# Altium PCB PCB1.PcbDoc
Units mil, origin at the board's own origin, x right, y up, seen from the top; angles counter-clockwise.
Board outline 3755 x 4055 mil, 2 copper layers (Top Layer, Bottom Layer); 83 components, 78 nets, 332 pads, 78 vias.
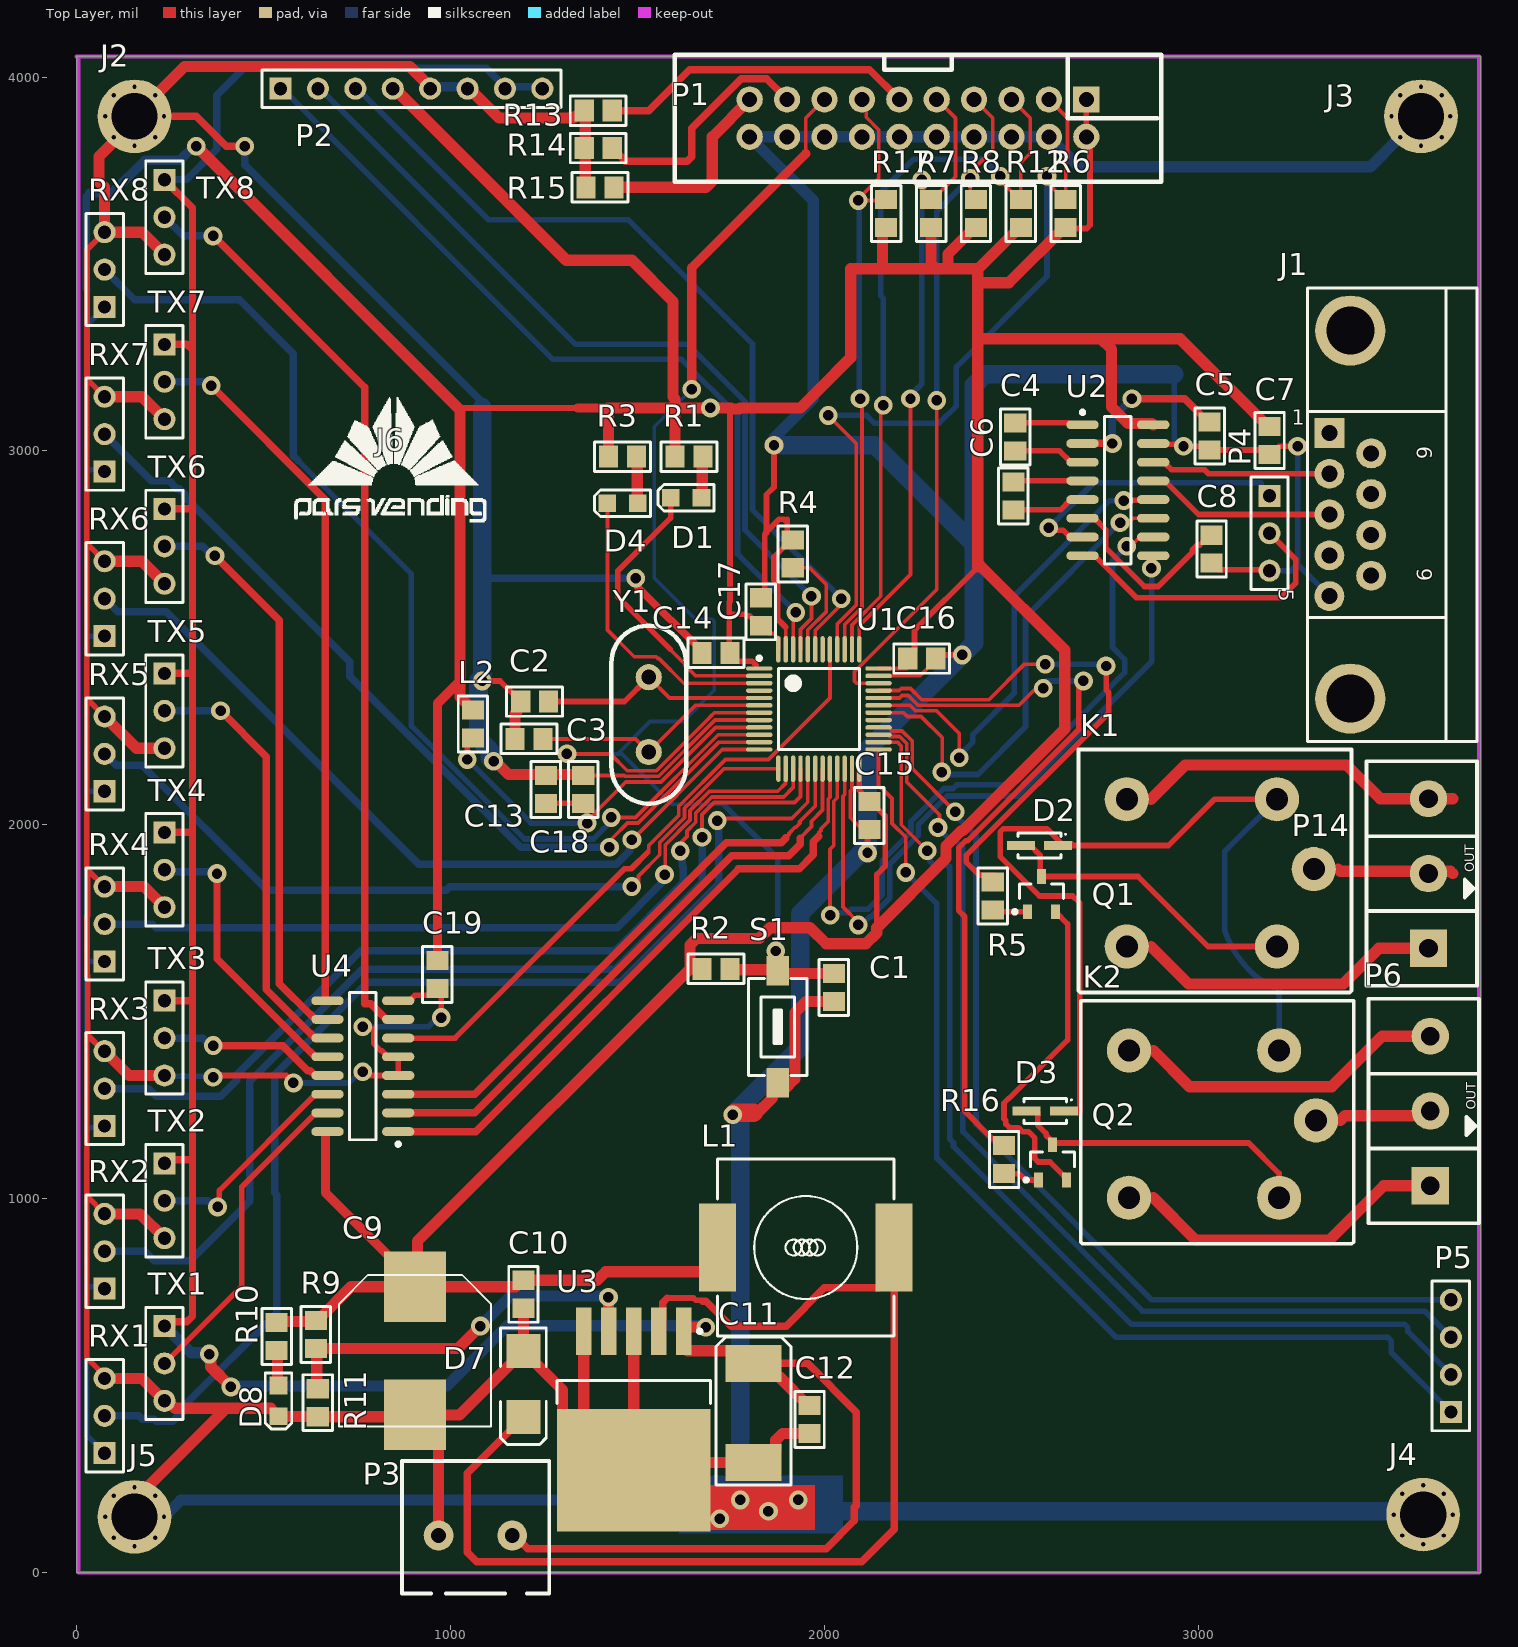
[diagram p0: Top Layer view]
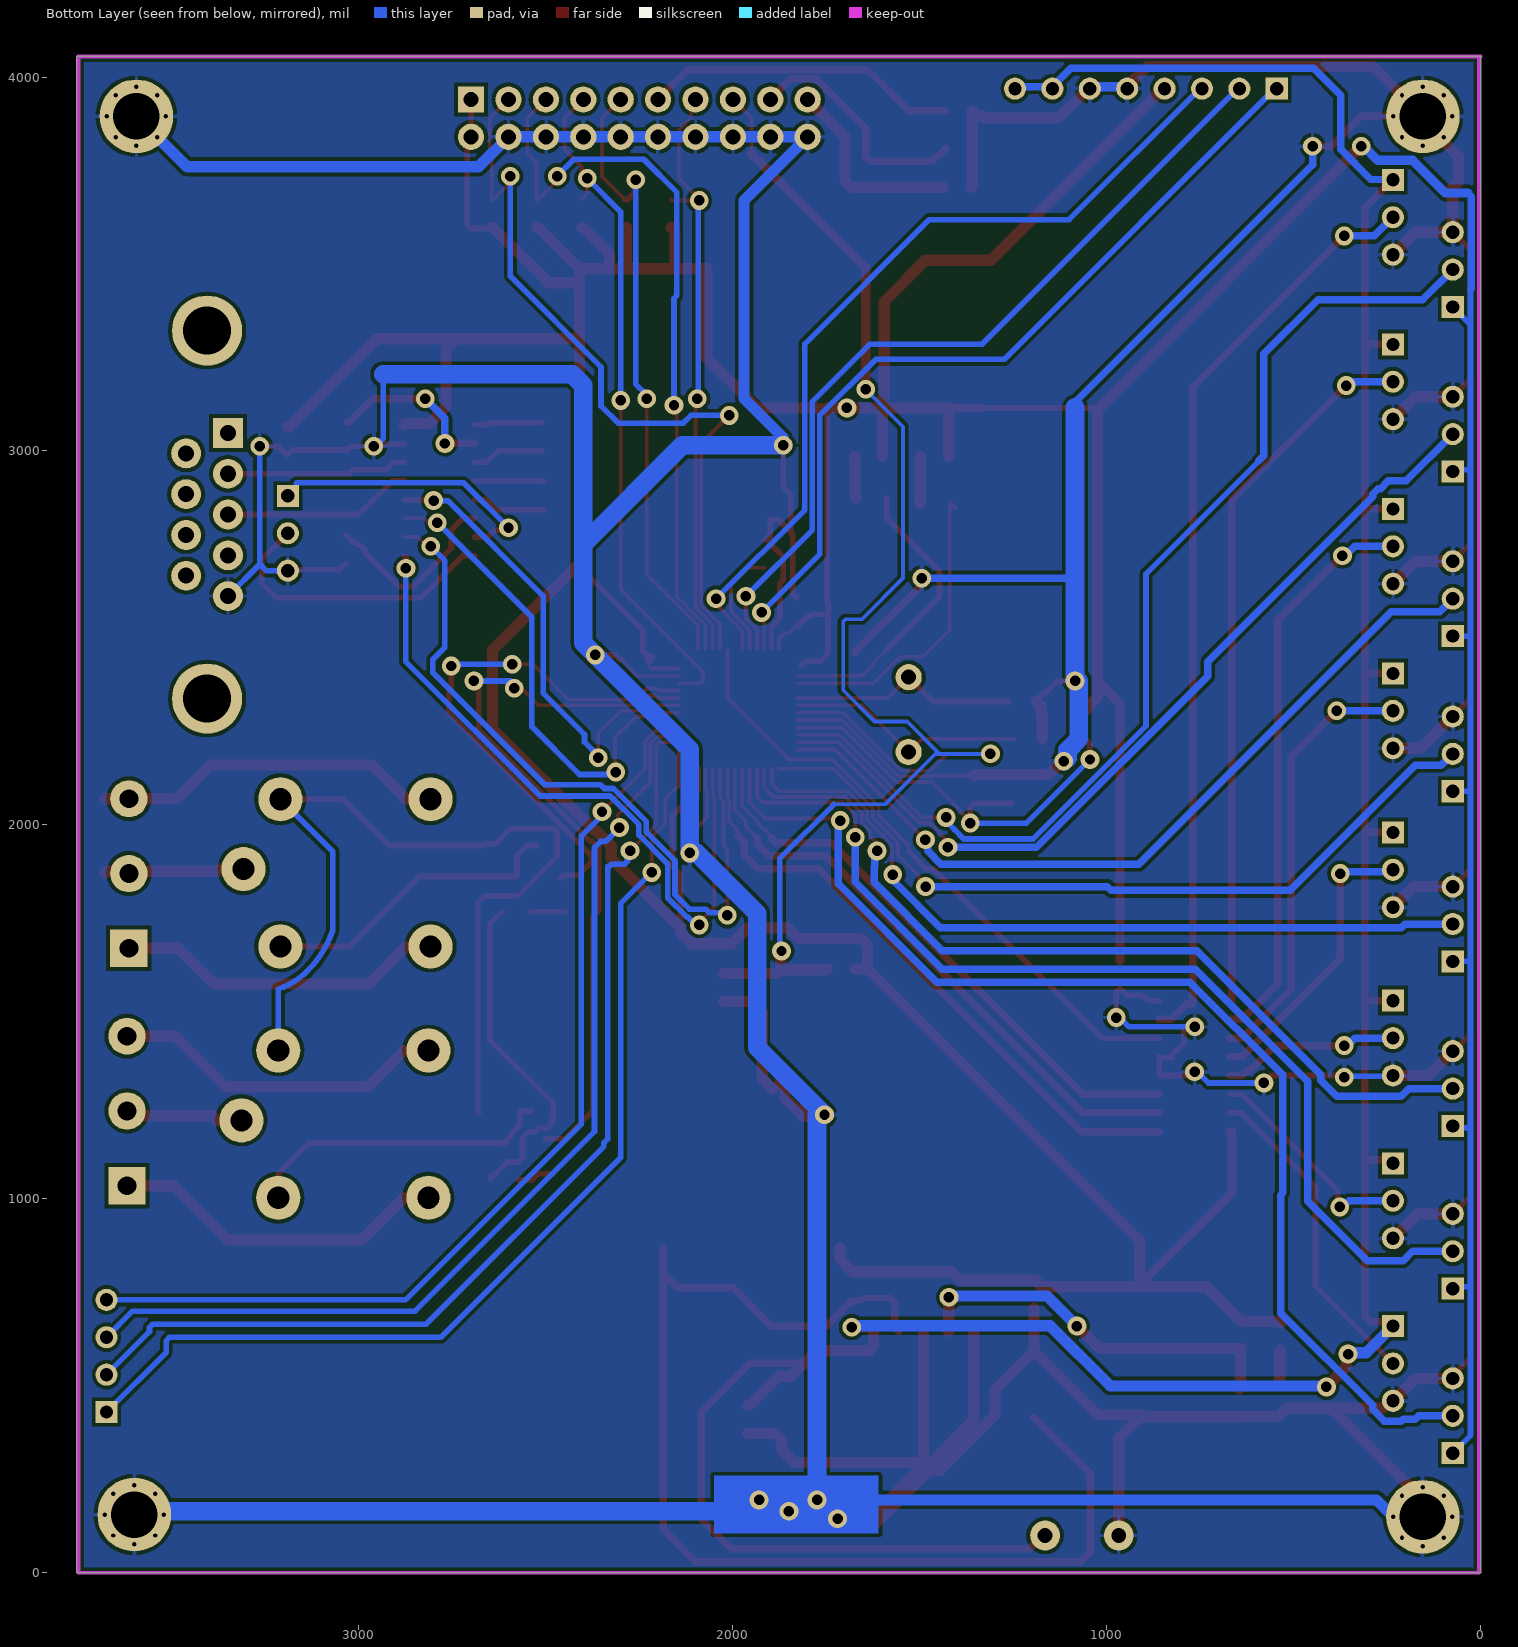
[diagram p1: Bottom Layer view, seen from below]
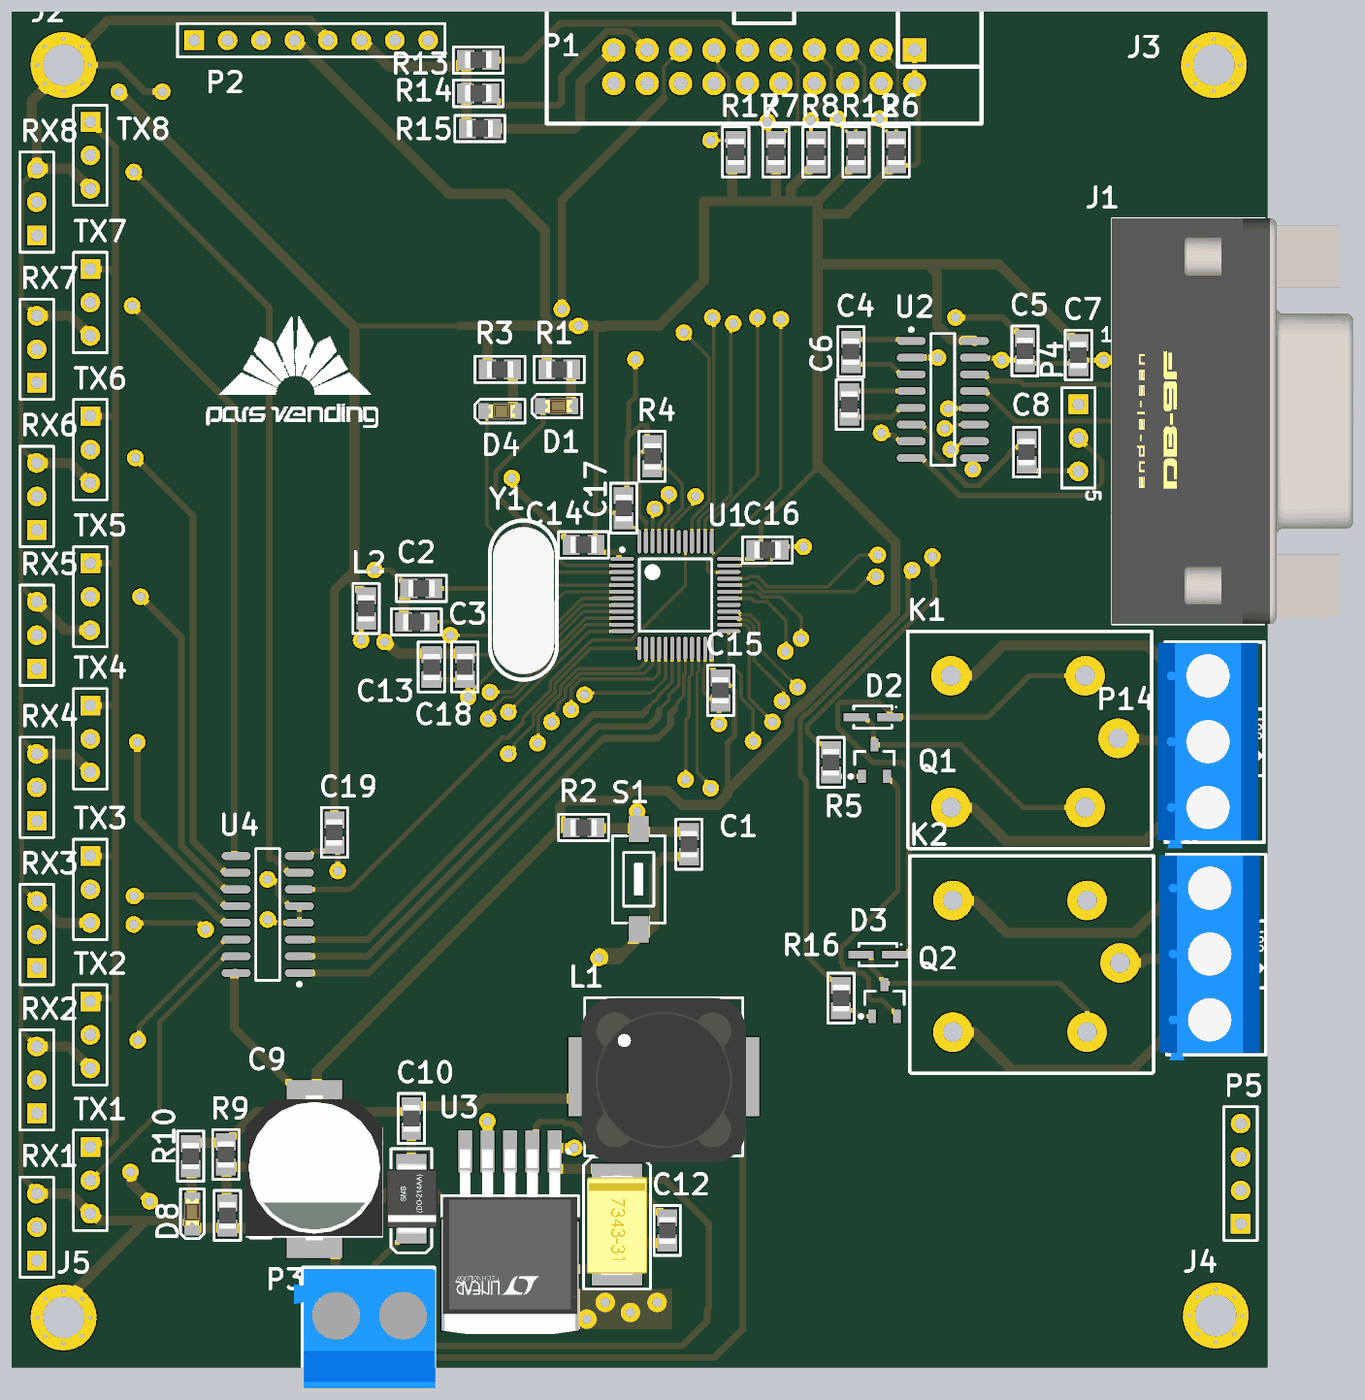
[diagram p2: 3D render of the assembled board from above, using the file's embedded part models]

## Layer stack, top to bottom
Top Solder: solder mask 0.4, Solder Resist, Dk 3.5
Top Layer: signal copper 1.4
Dielectric 1: dielectric 12.6, FR-4, Dk 4.8
Bottom Layer: signal copper 1.4
Bottom Solder: solder mask 0.4, Solder Resist, Dk 3.5

## Board outline
0,0 3755,0 3755,4055 0,4055

## Design rules (kind name [scope] priority, off if disabled: settings)
Clearance [All] p1: gap=10 ignorepadtopadclearanceinfootprint=FALSE except(0: Arc-Hole Track-Hole SMDPad-Hole THPad-Hole Via-Hole Fill-Hole Poly-Hole Region-Hole Text-Hole; 1: Arc-Arc Arc-Track Arc-SMDPad Arc-Text Track-Track Track-SMDPad Track-Text SMDPad-Text THPad-Text Via-Text Fill-Text Poly-Text Region-Text Text-Text; 5: Arc-THPad Arc-Via Track-THPad Track-Via SMDPad-SMDPad SMDPad-THPad SMDPad-Via THPad-THPad THPad-Via Via-Via)
PolygonConnect [All] p1: connectstyle=Relief reliefconductorwidth=10 reliefentries=4 polygonreliefangle="90 Angle" airgapwidth=10
RoutingVias [All] p1: holewidth=28 width=50 viastyle="Through Hole" minholewidth=28 minwidth=50 maxholewidth=28 maxwidth=50
SilkToSilkClearance [All] p1: silktosilkclearance=1
SilkToSolderMaskClearance [IsPad] p1: minsilkscreentomaskgap=1 clearancetoexposedcopper=TRUE
SolderMaskExpansion [All] p1: expansion=4 istentingtop=FALSE
Width [All] p1: maxlimit=50 minlimit=10 preferedwidth=30 minimp=50.000000 maximp=50.000000 favimp=50.000000
28 further rules are at their usual default settings.

## Classes and differential pairs
component class IR: C19 D2 D3 K1 K2 P6 P14 Q1 Q2 R5 R16 RX1 RX2 RX3 RX4 RX5 RX6 RX7 RX8 TX1 TX2 TX3 TX4 TX5 TX6 TX7 TX8 U4
component class ControlBoard: C1 C2 C3 C4 C5 C6 C7 C8 C9 C10 C11 C12 C13 C14 C15 C16 C17 C18 D1 D4 D7 D8 J1 J2 J3 J4 J5 L1 L2 P1 P2 P3 P4 P5 R1 R2 R3 R4 R6 R7 R8 R9 R10 R11 R12 R13 R14 R15 R17 S1 U1 U2 U3 Y1

## Components (designator, comment, footprint, x,y, rotation, side; value= is the part's Value field where it differs from the comment)
C1 "10uF" 0805 2025,1565 r90 top
C2 "22pF" 0805 1225,2330 r0 top
C3 "22pF" 0805 1210,2230 r0 top
C4 "100nF" 0805 2510,3037.6 r270 top
C5 "100nF" 0805 3030,3040 r270 top
C6 "100nF" 0805 2505,2880 r270 top
C7 "100nF" 0805 3190,3027.6 r270 top
C8 "100nF" 0805 3035,2737.4 r270 top
C9 "1000uF-16v" CAP-SMD 905,422.48 r90 top
C10 "100nF" 0805 1195,745 r90 top
C11 "100uF-16v" 2817P 1810,430 r270 top
C12 "100nF" 0805 1960,410 r90 top
C13 "100nF" 0805 1255,2095 r90 top
C14 "100nF" 0805 1710,2460 r180 top
C15 "100nF" 0805 2120,2025 r270 top
C16 "100nF" 0805 2260,2445 r0 top
C17 "100nF" 0805 1830,2570 r90 top
C18 "10uF" 0805 1355,2095 r90 top
C19 "100nF" 0805 965,1600 r270 top
D1 "LED" LED-0805-RED 1630,2875 r0 top
D2 "1N4148" "diode smd" 2575,1945 r0 top
D3 "1N4148" "diode smd" 2590,1235 r0 top
D4 "LED" LED-0805-RED 1460,2860 r0 top
D7 "SM5822 SMB" SMB 1195,505 r270 top
D8 "LED" LED-0805-RED 540,460 r90 top
J1 "D Connector 9" DSUB1.385-2H9 3780,2830 r270 top
J2 "Socket" "Board Screw_No Silk" 155,3895 r0 top
J3 "Socket" "Board Screw_No Silk" 3595,3895 r0 top
J4 "Socket" "Board Screw_No Silk" 3600.68,155.68 r0 top
J5 "Socket" "Board Screw_No Silk" 155,150 r0 top
J6 "Socket" Logo 580,2815 r0 top
K1 "Relay12volt _child" RELAY 3009.21,1871.85 r0 top
K2 "Relay12volt _child" RELAY 3015,1200 r0 top
L1 "100uH" IND_SMD12X12 1950,870 r180 top
L2 "Ferrite bead" 0805 1060,2270 r90 top value=10mH
P1 "Header 10X2" IDC20-I 2182,4015 r180 top
P2 "Header 8" HDR1X8 545.56,3968.9 r0 top
P3 "Header 2" "Terminal 1*2" 870,-55 r0 top
P4 "Header 3" HDR1X3 3190,2880 r270 top
P5 "Header 4" HDR1X4 3675,430 r90 top
P6 "kf301/3pin" "Blue Connector 1*3 -kf301" 3769.53,935.24 r90 top
P14 "kf301/3pin" "Blue Connector 1*3 -kf301" 3764.53,1570.24 r90 top
Q1 "PMBT2222A/SMD" transistoor1 2580,1815 r90 top
Q2 "PMBT2222A/SMD" transistoor1 2610,1097.76 r90 top
R1 "1K" 0805 1637.4,2985 r0 top
R2 "10K" 0805 1710,1615 r0 top
R3 "1K" 0805 1460,2985 r0 top
R4 "10K" 0805 1915,2725 r90 top
R5 "470R" RES 2455,1815 r270 top
R6 "10K" 0805 2645,3635 r90 top
R7 "10K" 0805 2285,3635 r90 top
R8 "10K" 0805 2405,3635 r90 top
R9 "12k" 0805 640,637.4 r90 top
R10 "330" 0805 535,632.4 r90 top
R11 "4.7k" 0805 645,455 r90 top
R12 "10K" 0805 2525,3635 r90 top
R13 "10K" 0805 1395,3910 r180 top
R14 "10K" 0805 1395,3810 r180 top
R15 "10K" 0805 1400,3705 r180 top
R16 "470R" RES 2485,1110 r270 top
R17 "10K" 0805 2165,3635 r90 top
RX1 "Header 3" HDR1X3 75,320 r90 top
RX2 "Header 3" HDR1X3 75,760 r90 top
RX3 "Header 3" HDR1X3 75,1195 r90 top
RX4 "Header 3" HDR1X3 75,1635 r90 top
RX5 "Header 3" HDR1X3 75,2090 r90 top
RX6 "Header 3" HDR1X3 75,2505 r90 top
RX7 "Header 3" HDR1X3 75,2945 r90 top
RX8 "Header 3" HDR1X3 75,3385 r90 top
S1 "SW-PB" TUCHSWITCH_SMD_2 1875,1460 r90 top
TX1 "Header 3" HDR1X3 235,660 r270 top
TX2 "Header 3" HDR1X3 235,1095 r270 top
TX3 "Header 3" HDR1X3 235,1530 r270 top
TX4 "Header 3" HDR1X3 235,1980 r270 top
TX5 "Header 3" HDR1X3 235,2405 r270 top
TX6 "Header 3" HDR1X3 235,2845 r270 top
TX7 "Header 3" HDR1X3 235,3285 r270 top
TX8 "Header 3" HDR1X3 235,3725 r270 top
U1 "STM32F103CBT6" LQFP48_N 1985,2310 r0 top
U2 "MAX3232CSE" NSO16_N 2784.49,2895 r0 top
U3 "LM2576HVS-ADJ" TS5B_N 1490,410 r270 top
U4 "SN74HC238D" D016_N 765.51,1355 r180 top
Y1 "XTAL" XTAL 1530,2395 r270 top

## Footprints (in the part's own frame and the unit in brackets; to place one, negate y for a bottom-side part, rotate by r counter-clockwise, add the part's x,y. Pads: shape width x height; smd on the part's side, far side on the other; paste and mask are expansions set on the pad)
0805 [mm] "Chip Resistor, 2-Leads, Body 2.0x1.2mm, IPC Medium Density"
  rect 1.3x1.5 smd: 1(-0.95,0) 2(0.95,0)
  Top Layer pour cut-out: -0.635,1.27 -0.635,-1.27 0.635,-1.27 0.635,1.27
  silkscreen extent -1.9,-1 1.9,1, body extent -1,-0.64 1,0.62, height 0.47
2817P [mm]
  rect 2.5x3.8 smd: 1(3.429,0) 2(-3.302,0)
  silkscreen extent -5.08,-2.54 4.95,2.54, body extent -3.67,-2.3 3.93,2.3, height 3.1
"Blue Connector 1*3 -kf301" [mm]
  rect 2.54x2.54 hole 1.27: 1(2.534,3.798)
  round 2.54 hole 1.27: 2(7.614,3.798)
  oval 2.5x2.54 hole 1.27: 3(12.694,3.798)
  silkscreen extent -0.01,0.5 15.23,8, body extent -0.44,0.95 15.16,8.55, height 10
"Board Screw_No Silk" [mm]
  round 0.6 hole 0.3: 1(-2,0) 1(-1.414,-1.414) 1(-1.414,1.414) 1(0,-2) 1(0,2) 1(1.414,-1.414) 1(1.414,1.414) 1(2,0)
  round 5 hole 3.15 mask+0.1: 1(0,0)
CAP-SMD [mm]
  rect 4.8x4.2 smd: 1(8.7,0) 2(0,0)
  silkscreen extent -0.8,-5.15 9.5,5.15, body extent -1.05,-5.2 9.95,5.2, height 10.66
D016_N [mm] "SOIC, 16-Leads, Body 9.9x3.9mm, Pitch 1.27mm, IPC Medium Density"
  oval 2.2x0.6 smd: 1(-2.4,4.445) 2(-2.4,3.175) 3(-2.4,1.905) 4(-2.4,0.635) 5(-2.4,-0.635) 6(-2.4,-1.905) 7(-2.4,-3.175) 8(-2.4,-4.445) 9(2.4,-4.445) 10(2.4,-3.175) 11(2.4,-1.905) 12(2.4,-0.635) 13(2.4,0.635) 14(2.4,1.905) 15(2.4,3.175) 16(2.4,4.445)
  silkscreen extent -2.53,-5 0.9,5.42, body extent -2,-5 2,5, height 1.75
"diode smd" [mm] "Molded Capacitor, 2-Leads, Body 2.70x1.55mm, IPC Medium Density"
  rect 1.9x0.6 smd: 1(-1.27,0) 2(1.27,0)
  silkscreen extent -1.45,-0.85 1.83,0.85, body extent -1.47,-0.9 1.38,0.8, height 1.8
DSUB1.385-2H9 [mm] "Connector; D Subminiature; 9 Position; Right Angle; Pitch 1.385 mm"
  rect 2.032x2.032 hole 1.09: 1(-5.54,-10.92)
  round 2.032 hole 1.09: 2(-2.77,-10.92) 3(0,-10.92) 4(2.77,-10.92) 5(5.54,-10.92) 6(-4.155,-8.08) 7(-1.385,-8.08) 8(1.385,-8.08) 9(4.155,-8.08)
  round 4.76 hole 3.26: 10(-12.495,-9.5) 11(12.495,-9.5)
  silkscreen extent -15.4,-12.4 15.4,-0.89, body extent -15.4,-12.45 15.4,5.85, height 12.62
HDR1X3 [mm] "Connector; Header; 3 Position"
  rect 1.5x1.5 hole 0.9: 1(0,0)
  round 1.5 hole 0.9: 2(2.54,0) 3(5.08,0)
  silkscreen extent -1.27,-1.27 6.35,1.27
HDR1X4 [mm] "Connector; Header; 4 Position"
  rect 1.5x1.5 hole 0.9: 1(0,0)
  round 1.5 hole 0.9: 2(2.54,0) 3(5.08,0) 4(7.62,0)
  silkscreen extent -1.27,-1.27 8.89,1.27
HDR1X8 [mm] "Connector; Header; 8 Position"
  rect 1.5x1.5 hole 0.9: 1(0,0)
  round 1.5 hole 0.9: 2(2.54,0) 3(5.08,0) 4(7.62,0) 5(10.16,0) 6(12.7,0) 7(15.24,0) 8(17.78,0)
  silkscreen extent -1.27,-1.27 19.05,1.27
IDC20-I [mil]
  rect 70x70 hole 40: 1(-518,75)
  round 70 hole 40: 2(-518,175) 3(-418,75) 4(-418,175) 5(-318,75) 6(-318,175) 7(-218,75) 8(-218,175) 9(-118,75) 10(-118,175) 11(-18,75) 12(-18,175) 13(82,75) 14(82,175) 15(182,75) 16(182,175) 17(282,75) 18(282,175) 19(382,75) 20(382,175)
  silkscreen extent -718,-45 582,295
IND_SMD12X12 [mm]
  rect 2.5x6 smd: 1(-6,0) 2(6,0)
  silkscreen extent -6,-6 6,6, body extent -6.25,-6 6.25,6.5, height 7.44
LED-0805-RED [mm] "hip Capacitor, 2-Leads, Body 2.1x1.4mm, IPC Medium Density"
  rect 1.2x1.2 smd: 1(1.041,0) 2(-1.041,0)
  Top Layer pour cut-out: 0.762,-1.143 -0.762,-1.143 -0.762,1.143 0.762,1.143
  silkscreen extent -1.9,-0.9 1.9,0.9, body extent -0.88,-0.62 1.14,0.62, height 1.1
Logo [mil]
  silkscreen extent 2,-4 516,328
LQFP48_N [mm] "Thin QFP, 48-Leads, Body 7x7mm, Pitch 0.5mm, IPC Medium Density"
  oval 1.8x0.3 smd: 1(-4.05,2.75) 2(-4.05,2.25) 3(-4.05,1.75) 4(-4.05,1.25) 5(-4.05,0.75) 6(-4.05,0.25) 7(-4.05,-0.25) 8(-4.05,-0.75) 9(-4.05,-1.25) 10(-4.05,-1.75) 11(-4.05,-2.25) 12(-4.05,-2.75) 25(4.05,-2.75) 26(4.05,-2.25) 27(4.05,-1.75) 28(4.05,-1.25) 29(4.05,-0.75) 30(4.05,-0.25) 31(4.05,0.25) 32(4.05,0.75) 33(4.05,1.25) 34(4.05,1.75) 35(4.05,2.25) 36(4.05,2.75)
  oval 0.3x1.8 smd: 13(-2.75,-4.05) 14(-2.25,-4.05) 15(-1.75,-4.05) 16(-1.25,-4.05) 17(-0.75,-4.05) 18(-0.25,-4.05) 19(0.25,-4.05) 20(0.75,-4.05) 21(1.25,-4.05) 22(1.75,-4.05) 23(2.25,-4.05) 24(2.75,-4.05) 37(2.75,4.05) 38(2.25,4.05) 39(1.75,4.05) 40(1.25,4.05) 41(0.75,4.05) 42(0.25,4.05) 43(-0.25,4.05) 44(-0.75,4.05) 45(-1.25,4.05) 46(-1.75,4.05) 47(-2.25,4.05) 48(-2.75,4.05)
  silkscreen extent -4.17,-2.75 2.75,3.57, body extent -3.5,-3.5 3.5,3.5, height 1.6
NSO16_N [mm] "SOIC, 16-Leads, Body 9.9x3.9mm, Pitch 1.27mm, IPC Medium Density"
  oval 2.2x0.6 smd: 1(-2.4,4.445) 2(-2.4,3.175) 3(-2.4,1.905) 4(-2.4,0.635) 5(-2.4,-0.635) 6(-2.4,-1.905) 7(-2.4,-3.175) 8(-2.4,-4.445) 9(2.4,-4.445) 10(2.4,-3.175) 11(2.4,-1.905) 12(2.4,-0.635) 13(2.4,0.635) 14(2.4,1.905) 15(2.4,3.175) 16(2.4,4.445)
  silkscreen extent -2.52,-5 0.9,5.42, body extent -2,-5 2,5, height 1.75
RELAY [mm]
  round 3 hole 1.5: 1(7.6,0.254) 2(-5.1,-5) 3(-5.1,5) 4(5.1,-5) 5(5.1,5)
  silkscreen extent -8.38,-8.13 10.16,8.38
RES [mm]
  rect 1.3x1.5 smd: 1(-0.823,-0.127) 2(1.077,-0.127)
  Top Layer pour cut-out: -0.508,1.143 -0.508,-1.397 0.762,-1.397 0.762,1.143
  silkscreen extent -1.77,-1.13 2.03,0.87, body extent -0.87,-0.76 1.13,0.49, height 0.47
SMB [mm] "DO-214-AA/SMB; 2 C-Bend Leads; Body 5.3 x 3.6 mm, inc. leads (LxW)"
  rect 2.3x2.3 smd: 1(-2.25,0) 2(2.25,0)
  silkscreen extent -3.8,-1.55 4.1,1.55, body extent -2.75,-1.91 2.75,1.99, height 2.45
"Terminal 1*2" [mil]
  round 80 hole 40: 1(98.15,155) 2(295,155)
  silkscreen extent 0,0 394,354, body extent -26,-7 396,350, height 503
transistoor1 [mm] "SOT23, 3-Leads, Body 2.90x2.45mm, Pitch 0.95mm, IPC Medium Density"
  rect 1x0.6 smd: 1(-1.2,0.95) 2(1.2,0) 3(-1.2,-0.95)
  silkscreen extent -1.32,-1.5 0.7,1.92, body extent -0.7,-1.5 0.7,1.5, height 2.5
TS5B_N [mm] "D2-PAK, 6-Leads, Body 8.6x10.2mm, Pitch 1.7mm, Lead Span 14.1mm, IPC Medium Density"
  rect 3.2x1.05 smd: 1(-6,3.4) 2(-6,1.7) 3(-6,0) 4(-6,-1.7) 5(-6,-3.4)
  rect 8.3x10.45 smd: 6(3.45,0)
  silkscreen extent -6.12,-5.2 -1.1,5.2, body extent -6.17,-5.11 7.87,5.11, height 4.38
TUCHSWITCH_SMD_2 [mm] "Miniature Push Button Switch,SMD Series; Body 4.6x3.0mm, 2-Leads"
  rect 2x1.5 smd: 1(-3.81,0) 2(3.81,0)
  silkscreen extent -3.3,-2 3.3,2, body extent -3.05,-1.91 3.05,1.91, height 2.67
XTAL [mil]
  round 70 hole 40: 1(0,0) 2(200,0)
  silkscreen extent -138,-100 338,100, body extent -119,-92 321,92, height 143

## Part data
C1: library part VP32BY104, "Dipped Radial Multilayer Ceramic Capacitor X7R: 100nF", PackageDocument=4-Feb-2002, ComponentLink1Description="Manufacturer Link", ComponentLink1URL=http://www.vishay.com/, DatasheetDocument=4-Feb-2002, Note="See Datasheet for other packages & tolerances", PackageReference=VP32-2.5, Published=17-Dec-2003, Publisher="Altium Limited"
C2 C3 C4 C5 C6 C7 C8 C10 C12 C13 C14 C15 C16 C17 C18 C19: library part Cap, "Capacitor", LatestRevisionDate=17-Jul-2002, LatestRevisionNote="Re-released for DXP Platform.", PackageDescription="Radial Cap, Thru-Hole; 2 Leads; 0.3 in Pin Spacing", PackageReference=RAD-0.3, Published=8-Jun-2000, Publisher="Altium Limited"
C9: library part Cap2, "Aluminium Electrolytic Capacitor-SMD", PackageDescription="Capacitor; 2 Leads", PackageReference=CAPR5-4X5, Published=23-Sep-2002, Publisher="Altium Limited"
C11: library part Cap2, "Tantalum Chip Capacitor-SMD", PackageDescription="Capacitor; 2 Leads", PackageReference=CAPR5-4X5, Published=23-Sep-2002, Publisher="Altium Limited"
D1 D4: library part LED0, "Typical INFRARED GaAs LED", LatestRevisionDate=08-Jul-2005, LatestRevisionNote="Mech Layer 1 removed.", PackageDescription="LED; 2 Leads", PackageReference=LED-0, Published=8-Jun-2000, Publisher="Altium Limited"
D2 D3: library part "Diode 1N4007", "1 Amp General Purpose Rectifier", Code_JEDEC=DO-204-AL, ComponentLink1Description="Manufacturer Link", ComponentLink1URL=http://www.fairchildsemi.com/, ComponentLink2Description=Datasheet, ComponentLink2URL=http://www.fairchildsemi.com/ds/1N%2F1N4001.pdf, DatasheetVersion=1998, LatestRevisionDate=17-Jul-2002, LatestRevisionNote="Re-released for DXP Platform.", PackageDescription="Diode, Axial; Body 5.2 x 2.7 mm (LxDia. max), Lead Dia. 0.86 mm (max)", PackageReference=DO-41, PackageVersion=Aug-1999, Published=8-Jun-2000, Publisher="Altium Limited"
D7: library part "Diode 1N5822", "Silicon AF Schottky Diode for High-Speed Switching", ComponentLink1Description="Manufacturer Link", ComponentLink1URL=http://www.infineon.com/, ComponentLink2Description=Datasheet, ComponentLink2URL=http://www.infineon.com/upload/Document/cmc_upload/documents/009/382/bas40_bas140series_1.pdf, DatasheetVersion=Oct-1999, LatestRevisionDate=29-May-2009, LatestRevisionNote="IPC-7351 Footprint Added.", Note="Pin 2 is not connected and not drawn.", PackageDescription="3-Pin SOT-23 Package 0.95 mm Pitch, 2.5 mm Lead Span", PackageReference=SOT-23, PackageVersion=Sep-2001, Published=21-Mar-2003, Publisher="Altium Limited"
D8: library part LED2, "Typical RED, GREEN, YELLOW, AMBER GaAs LED", LatestRevisionDate=17-Jul-2002, LatestRevisionNote="Re-released for DXP Platform.", PackageDescription="SM LED; 2 Flat Leads", PackageReference=3.2X1.6X1.1, PackageVersion=Feb-2002, Published=8-Jun-2000, Publisher="Altium Limited"
J1: "Receptacle Assembly, 9 Position, Right Angle", PackageDocument=O, DatasheetDocument=1-Sep-1999, Gender=Receptacle, LatestRevisionDate=17-Jul-2002, LatestRevisionNote="Re-released for DXP Platform.", Orientation="Right Angle", PackageReference=788750, Positions=9, Published=15-Jun-2001, Publisher="Altium Limited"
K1 K2: library part Relay, "SPDT Relay", LatestRevisionDate=17-Jul-2002, LatestRevisionNote="Re-released for DXP Platform.", PackageReference=MODULE5B, Published=8-Jun-2000, Publisher="Altium Limited"
L1: library part "Inductor Iron", "Magnetic-Core Inductor", LatestRevisionDate=17-Jul-2002, LatestRevisionNote="Re-released for DXP Platform.", PackageDescription="Axial Device, Thru-Hole; 2 Leads; 0.9 in Pin Spacing", PackageReference=AXIAL-0.9, Published=24-Mar-1999, Publisher="Altium Limited"
L2: library part Inductor, "Inductor", Code_IEC=1005, Code_JEITA=0402, LatestRevisionDate=29-May-2009, LatestRevisionNote="IPC-7351 Footprint Added.", PackageDescription="Chip Inductor", PackageReference=0402-A, Published=8-Jun-2000, Publisher="Altium Limited"
P1: "Header, 10-Pin, Dual row", LatestRevisionDate=17-Jul-2002, LatestRevisionNote="Re-released for DXP Platform.", Publisher="Altium Limited"
P2: "Header, 8-Pin", LatestRevisionDate=17-Jul-2002, LatestRevisionNote="Re-released for DXP Platform.", Publisher="Altium Limited"
P3: "Header, 2-Pin", LatestRevisionDate=17-Jul-2002, LatestRevisionNote="Re-released for DXP Platform.", Publisher="Altium Limited"
P4 RX1 RX2 RX3 RX4 RX5 RX6 RX7 RX8 TX1 TX2 TX3 TX4 TX5 TX6 TX7 TX8: "Header, 3-Pin", LatestRevisionDate=17-Jul-2002, LatestRevisionNote="Re-released for DXP Platform.", Publisher="Altium Limited"
P5: "Header, 4-Pin", LatestRevisionDate=17-Jul-2002, LatestRevisionNote="Re-released for DXP Platform.", Publisher="Altium Limited"
P6 P14: library part "Header 3", LatestRevisionDate=17-Jul-2002, LatestRevisionNote="Re-released for DXP Platform.", Publisher="Altium Limited"
Q1 Q2: library part 2N2222A/ZTX, PSpiceTemplate="Q^@REFDES %C %B %E @MODEL ?AREA/@AREA/"
R1 R2 R3 R4 R5 R6 R7 R8 R12 R13 R14 R15 R16 R17: library part Res1, "Resistor", LatestRevisionDate=17-Jul-2002, LatestRevisionNote="Re-released for DXP Platform.", PackageDescription="Axial Device, Thru-Hole; 2 Leads; 0.3 in Pin Spacing", PackageReference=AXIAL-0.3, Published=8-Jun-2000, Publisher="Altium Limited"
R9 R10 R11: library part Res3, "Resistor", LatestRevisionDate=29-May-2009, LatestRevisionNote="IPC-7351 Footprint Added.", PackageDescription="Chip Resistor", PackageReference=J1-0603, Published=8-Jun-2000, Publisher="Altium Limited"
S1: "Switch", LatestRevisionDate=17-Jul-2002, LatestRevisionNote="Re-released for DXP Platform.", PackageDescription="Switch; 2 Leads", PackageReference=SPST-2, Published=24-Mar-1999, Publisher="Altium Limited"
U1: "STM32 ARM-based 32-bit MCU Performance Line with 128 kB Flash, 20 kB Internal RAM, -40 to +85°C Temperature, 48-Pin LQFP, Tray", ComponentLink1Description="Manufacturer URL", ComponentLink1URL=http://www.st.com/, ComponentLink2Description="STM32F103 Datasheet", ComponentLink2URL=http://www.st.com/internet/com/TECHNICAL_RESOURCES/TECHNICAL_LITERATURE/DATASHEET/CD00161566.pdf, ComponentLink3Description="STM32 Family Web Page", ComponentLink3URL=www.st.com/stm32, DatasheetVersion="rev13.0, Apr-2011", PackageDescription="48-Pin Low-Profile Quad Flat Pack, 7 x 7 mm Body, 0.5 mm Pitch (LQFP48)", PackageReference=LQFP48, PackageVersion="rev13, Apr-2011"
U2: "3.0V TO 5.5V, Low-Power, up to 1Mbps, True RS-232 Transceiver Using Four 0.1µF External Capacitor", Code_IPC=SOIC127P600-16, Code_JEDEC=MS-012-AC, ComponentLink1Description="Manufacturer Link", ComponentLink1URL=http://www.maxim-ic.com/, ComponentLink2Description=Datasheet, ComponentLink2URL=http://pdfserv.maxim-ic.com/en/ds/MAX3222-MAX3241.pdf, DatasheetVersion=Mar-1999, LatestRevisionDate=13-Apr-2006, LatestRevisionNote="IPC-7351 Footprint Added.", PackageDescription="16-Pin Small Outline Integrated Circuit 1.27 mm Pitch", PackageReference=NSO16, Published=16-Jan-2001, Publisher="Altium Limited"
U3: "SIMPLE SWITCHER® 3A Step-Down Voltage Regulator, 5-pin TO-263", Manufacturer="National Semiconductor", PackageTopMarking="NSUZXYTTE#*LM2576*HVS-ADJ P+", PowerWise=N, Code_JEDEC=MO-169-AB, ComponentLink1Description="Manufacturer URL", ComponentLink1URL=http://www.national.com/, ComponentLink2Description="LM2576HV Datasheet", ComponentLink2URL=http://www.national.com/ds/LM/LM2576HV.pdf, ComponentLink3Description="LM2576HV Web Page", ComponentLink3URL=http://www.national.com/pf/LM/LM2576HV.html, ComponentLink4Description="TS5B Package Page", ComponentLink4URL=http://www.national.com/packaging/folders/ts5b.html, CompType=Switcher, DatasheetVersion=Aug-2004, High-Reliability=Y, PackageDescription="TO-263, Molded, .400 x .390 x .180in, 5 Lead, .067in Pitch, Surface Mount", PackageReference=TS5B, PackageVersion="revD, Apr-2005", PartNumber=LM2576HVS-ADJ, PinCount=5, RoHS=N
U4: "3-Line to 8-Line Decoder / Demultiplexer", Code_IPC=SOIC127P600-16, ComponentLink1Description="Manufacturer Link", ComponentLink1URL=http://www.ti.com/, DatasheetVersion=Jun-1989, LatestRevisionDate=13-Apr-2006, LatestRevisionNote="IPC-7351 Footprint Added.", PackageDescription="16-Pin Small Outline Integrated Circuit 1.27 mm Pitch", PackageReference=D016, PackageVersion=Jan-1998, Published=8-Jun-2000, Publisher="Altium Limited"
Y1: "Crystal Oscillator", LatestRevisionDate=17-Jul-2002, LatestRevisionNote="Re-released for DXP Platform.", PackageDescription="Crystal, Thru-Hole; 2 Leads; Body 3.1 x 8.2 mm (Dia.xH)", PackageReference=R38, Published=8-Jun-2000, Publisher="Altium Limited"
J2 J3 J4 J5 J6: LatestRevisionDate=17-Jul-2002, LatestRevisionNote="Re-released for DXP Platform.", Publisher="Altium Limited"

## Via types
v1: diameter 50, hole 28, Top Layer to Bottom Layer, 78 vias

## Nets (pads, with @x,y where several pads share a name; then routed paths per layer and width w, separated by ;. In a path a pad name is that pad's centre, name@x,y a point inside that pad or via, vN(x,y) a via of type N, cw(c..) or ccw(c..) an arc to the next point about the centre after c; other vN are vias at no path point)
3.3V: C7.1 C9.1 C10.2 C14.1 C15.1 C16.1 C17.1 C19.1 L1.2 L2.2 P1.1 P1.2 P2.4 R1.1 R2.1 R3.1 R6.1 R7.1 R8.1 R9.2 R10.2 R12.1 R17.1 RX1.1 RX2.1 RX3.1 RX4.1 RX5.1 RX6.1 RX7.1 RX8.1 U1.1 U1.24 U1.36 U1.48 U2.16 U4.16 | length 19827.5
  Top Layer w10: C17.1 1850.59,2512.01 1863.21,2512.01 1876.73,2498.49 U1.48 ; U1.36 2219.8,2418.27 2223.27,2421.73 C16.1@2223.27,2445
  Top Layer w15: 965,2065 969.8,2060.2 ; 1020,3115 1340,3115 ; 1750,3115 1747.4,3112.4 1747.4,2597.4 1745,2595 1745,2562.86 ; 1816.83,2426.99 1805.85,2437.97 1765.49,2437.97 1747.4,2456.06 C14.1 1745,2462.4 1745,2562.86 ; C17.1 1826.06,2532.6 1799.35,2559.31 1791.15,2559.31 1787.6,2562.86 1745,2562.86 ; U1.24 2093.27,2092.62 2097.97,2087.91 2097.97,2080.49 2116.06,2062.4 C15.1@2123.94,2062.4 ; C15.1 C15.1@2123.94,2062.4 ; 2140,1725 2140,1867.64 2162.03,1889.67 2162.03,2024.31 C15.1@2123.94,2062.4 ; C16.1@2222.6,2446.97 2240.69,2465.06 2240.69,2520.69 2410,2690 2415,2695 ; R6.1 2647.6,3595 2701.21,3595 2710,3603.79 2710,3830 P1.2 P1.1
  Top Layer w25: U4.16 666.2,1180 665.51,1179.31 665.51,1016.3 905,776.81 C9.1 ; C19.1 965,2065 965,2325 1025,2385 ; 1340,3115 1420,3115
  Top Layer w30: v1(320,3815) 1025,3110 1025,2385 1025,2342.4 1045.47,2321.93 1045.47,2317.99 1056.06,2307.4 L2.2 ; R10.2 537.5,672.3 637.5,672.3 R9.2 643.94,674.8 734.13,765 C9.1 1173.66,765 1191.06,782.4 C10.2 1391.69,782.4 1414.29,805 1679.57,805 1713.78,839.21 L1.2 ; P2.4 845.56,3973.9 1309.45,3510 1485,3510 1595,3400 1595,3144.29 1600,3139.29 1600,3115 ; C9.1@905,776.81 911.91,783.73 911.91,886.91 1640,1615 ; R3.1 1422.6,3112.4 1420,3115 1600,3115 ; R1.1 1600,3115 ; R2.1 1640,1615 ; 1747.4,3112.4 1772.4,3112.4 1775,3115 1935.71,3115 1965,3144.29 1982.57,3161.89 2070,3249.32 2070,3487.43 2285,3487.43 2297.57,3487.43 ; 1750,3115 v1(1695,3115) 1600,3115 ; 2155,3505 2155,3587.6 R17.1 ; C16.1 C16.1@2223.27,2445 ; R7.1 2285,3500 2297.57,3487.43 ; 2330,3505 2330,3526.54 2401.06,3597.6 R8.1 ; 2410,2690 2410,3300 ; 2415,2695 2642.5,2467.5 2642.5,2256.79 2370.71,1985 2366.11,1985 2325,1943.89 2325,1910 2140,1725 2140,1711.79 2110.71,1682.5 2003.75,1682.5 1961.25,1725 1854.29,1725 1825.28,1695.99 1657.57,1695.99 1640,1678.42 1640,1615 ; R12.1 2521.06,3597.6 2410,3486.54 ; R6.1 2641.06,3597.6 2493.46,3450 2410,3450 ; U2.16 2875.79,3073.19 2811.25,3073.19 2767.22,3117.22 2767.22,3272.78 2740,3300 ; C7.1 3186.06,3065 2951.06,3300 2740,3300 ; 2297.57,3487.43 2409.11,3487.43 2410,3486.54 ; 2410,3300 2410,3450 ; 2410,3300 2740,3300 ; 2410,3450 2410,3486.54
  Bottom Layer w15: 27.5,3432.5 27.5,3337.5 ; RX1.1 27.5,367.5 27.5,765 ; RX2.1 70,765 27.5,765 ; RX3.1 70,1190 27.5,1190 ; RX4.1 27.5,1635 ; RX5.1 27.5,2090 ; RX6.1 27.5,2505 ; RX7.1 70,2950 27.5,2950 ; RX8.1 27.5,3337.5 ; 27.5,765 27.5,1190 ; 27.5,1190 27.5,1635 ; 27.5,1635 27.5,2090 ; 27.5,2090 27.5,2505 ; 27.5,2505 27.5,2950 ; 27.5,2950 27.5,3337.5
  Bottom Layer w20: 27.5,3432.5 25.47,3434.53 25.47,3680.47 35,3690
  Bottom Layer w25: 35,3690 95,3690 182.03,3777.03 275.26,3777.03 313.24,3815 v1(320,3815)
12V: C11.2 C12.2 P2.7 P2.8 P3.2 TX1.1 TX2.1 TX3.1 TX4.1 TX5.1 TX6.1 TX7.1 TX8.1 U3.1 | length 8553.8
  Top Layer w20: TX1.1 246.24,671.24 294.53,671.24 310,686.72 310,1105 ; TX2.1 245,1105 310,1105 ; TX3.1 305,1530 310,1535 ; TX4.1 305,1980 310,1985 ; TX5.1 310,2405 ; TX6.1 305,2845 310,2850 ; TX7.1 295,3285 310,3270 ; TX8.1 310,3650 310,3270 ; P3.2 1171.72,100 1206.72,65 2005,65 2080,140 2080,175 2085,180 2085,430 1955,560 C11.2 ; 310,1105 310,1535 ; 310,1535 310,1985 ; 310,1985 310,2405 ; 310,2405 310,2850 ; 310,2850 310,3270
  Top Layer w30: v1(355,585) 358.83,581.17 358.83,551.17 v1(412.86,497.14) ; v1(1682.14,657.14) 1629.53,657.14 1623.86,651.48 1623.86,603.9 1633.54,594.21 1775.79,594.21 C11.2 1844.21,525.79 1877.68,525.79 1956.06,447.4 C12.2
  Bottom Layer w20: TX8.1 235.89,3725.89 294.53,3725.89 375,3806.36 375,3951.71 446.72,4023.42 1096.03,4023.42 1145.56,3973.9 P2.8@1245.56,3973.9
  Bottom Layer w30: TX1.1 306.17,588.83 351.17,588.83 v1(355,585) ; v1(412.86,497.14) 415.71,500 990.71,500 1151.39,660.68 1678.61,660.68 v1(1682.14,657.14)
#USART3_RX: P4.2 U2.8 | length 795.1
  Top Layer w15: U2.8 2721.5,2720 2834,2607.5 3220.74,2607.5 3260,2646.76 3260,2710 P4.2
#USART3_TX: P4.1 U2.7 | length 761.1
  Top Layer w15: v1(2600,2795) 2606.7,2788.3 2637.87,2788.3 2656.17,2770 U2.7
  Bottom Layer w15: v1(2600,2795) 2720,2915 3166.21,2915 3167.97,2913.24 3167.97,2902.03 P4.1
+12: D2.2 D3.2 K1.5 K2.5 | length 2554.3
  Top Layer w15: 2680,1230 2682.71,1232.71 2682.71,1790.96 2663.67,1810 2575,1810 2469.67,1915.33 2469.67,1981.21 2478.45,1990 2594.41,1990 2635.1,1949.31 2660.69,1949.31 2665,1945 2919.49,1945 3043.19,2068.7 K1.5
  Bottom Layer w15: K2.5@3215.79,1389.51 3215.79,1550.62 3215.79,1561.06 cw(c3282.3,1755.25) 3137.15,1610.11 cw(c3335.88,1808.83) 3070,1717.77 3070,1928.7 K1.5 K1.5@3242.5,2101.2
BOOT0: R4.1 U1.44 | length 302
  Top Layer w10: R4.1 1959.53,2687.6 2005,2642.13 2005,2570.94 1955.47,2521.41 U1.44
Clock: P2.3 U1.43 | length 2290.8
  Top Layer w10: U1.43 1975.16,2519.88 2037.35,2582.07 2037.35,2597.35 v1(2045,2605)
  Bottom Layer w15: P2.3@745.56,3973.9 1100.72,3618.73 1474.91,3618.73 1807.5,3286.14 1807.5,2842.5 v1(2045,2605)
COM_RELAY1: K1.1 P14.2 | length 311.5
  Top Layer w30: 3373.43,1881.85 3379.35,1875.93 3674.07,1875.93 3680,1870
COM_RELAY2: K2.1 P6.2 | length 246
  Top Layer w30: 3379.21,1210 3391.71,1222.5 P6.2@3620,1222.5
DataOut: P2.1 U1.46 | length 2279.5
  Top Layer w10: U1.46 1916.45,2469.8 1916.45,2561.34 1923.3,2568.2 v1(1923.37,2568.2)
  Bottom Layer w15: P2.1@545.56,3973.9 1274.45,3245 1618.03,3245 1767.35,3095.68 1767.35,2724.22 v1(1923.37,2568.2)
GND: C1.1 C2.1 C3.1 C5.2 C7.2 C8.2 C9.2 C10.1 C11.1 C12.1 C13.2 C14.2 C15.2 C16.2 C17.2 C18.2 C19.2 D7.1 D8.2 J1.5 J2.1 J3.1 J4.1 J5.1 P1.4 P1.6 P1.8 P1.10 P1.12 P1.14 P1.16 P1.18 P1.20 P2.5 P2.6 P3.1 P4.3 R4.2 R11.1 R13.2 R14.2 R15.2 RX1.3 RX2.3 RX3.3 RX4.3 RX5.3 RX6.3 RX7.3 RX8.3 S1.1 TX1.3 TX2.3 TX3.3 TX4.3 TX5.3 TX6.3 TX7.3 TX8.3 U1.8 U1.23 U1.35 U1.47 U2.15 U3.3 U3.5 U3.6 U4.4 U4.5 U4.8 | length 30349.5
  Top Layer w10: C18.2 1463.92,2132.4 1466.32,2130 1556.92,2130 1707.4,2280.47 U1.8 ; U1.47 1896.42,2528.58 ; U1.23 2073.58,2094.59 2069.47,2090.48 2069.47,2019.19 2103.56,1985.1 C15.2@2107.5,1985.1 ; U1.35 2254.92,2398.58 C16.2@2299.37,2443.03 ; C16.2 C16.2@2299.37,2443.03 ; C16.2@2300.86,2441.54 C16.2@2299.37,2443.03 ; C16.2@2309.37,2443.27 2302.59,2443.27 2299.61,2443.27 C16.2@2299.37,2443.03
  Top Layer w15: 27.5,3192.03 27.5,2752.5 ; RX1.3 75,527.5 27.5,575 27.5,1007.5 ; RX2.3 27.5,1007.5 ; RX3.3 72.5,1395 30,1437.5 ; RX4.3 30,1880 ; RX5.3 27.5,2337.5 ; RX6.3 27.5,2752.5 ; RX7.3 27.97,3192.03 27.97,3427.87 27.97,3447.03 27.97,3452 27.97,3452.19 27.97,3452.33 27.97,3537.97 RX8.3 ; v1(365,1325) 370,1330 560.74,1330 574.5,1316.24 574.5,1315.5 v1(580,1310) ; v1(765,1460) 770,1455 794.19,1455 794.19,1415.79 814.29,1395.69 816.88,1395.69 826.85,1385.72 826.85,1383.98 U4.5@830.84,1380 ; v1(765.51,1340) 774.98,1340 784.98,1330 856.02,1330 860,1333.98 U4.5 857.18,1377.18 U4.5@825.69,1377.18 ; U4.8 890.18,1530 904.69,1544.51 946.91,1544.51 C19.2 975,1552.6 v1(975,1485) ; v1(1085,2385) 1132.6,2385 1165.57,2352.03 1169.51,2352.03 1187.6,2333.94 C2.1 ; C17.2 1840,2617.4 1840,2775.64 1845,2780.64 1845,2783.61 ; 1842.03,2780.64 1845,2783.61 ; v1(1865,3015) 1865,2903.09 1845,2883.09 1845,2783.61 ; 1895.61,2813.01 1891.21,2817.4 1878.79,2817.4 1845,2783.61 ; 1896.42,2528.58 1875,2550 1875,2645 1865,2655 1865,2716.34 1900,2751.34 R4.2@1900,2762.4 ; 1900,2817.4 R4.2@1900,2777.4 ; v1(2115,1925) 2115,1982.6 C15.2 ; C16.2@2300.86,2441.54 2302.59,2443.27 2313.85,2454.53 v1(2367.97,2454.53) ; U2.15 2880.63,3018.35 2954.15,3018.35 v1(2960,3012.5) 3020.1,3012.5 C5.2 3177.6,3002.6 C7.2 3193.94,2990.2 3216.24,3012.5 v1(3265,3012.5) ; C8.2 3053.09,2681.91 3188.09,2681.91 P4.3 ; 27.5,1007.5 27.5,1440 30,1437.5 ; 27.5,2337.5 27.5,2752.5 ; 27.5,2337.5 27.5,1882.5 30,1880 ; 30,1437.5 30,1596.2 27.97,1598.22 27.97,1754.48 30,1756.51 30,1880 ; R4.2@1900,2762.4 R4.2@1900,2777.4 ; R4.2@1900,2762.4 R4.2 R4.2@1900,2777.4
  Top Layer w20: J2.1@167.83,3895 233.74,3895 320,3895 400,3815 v1(450,3815) ; v1(1495,2660) 1500.74,2654.26 1500.74,2635.8 1672.6,2463.94 C14.2
  Top Layer w30: RX1.3 175,520 TX1.3 242.86,460 262.86,440 400,440 ; RX2.3 170,960 TX2.3 ; RX3.3 140,1330 TX3.3 ; RX4.3 180,1835 TX4.3 ; RX5.3 160,2205 TX5.3 ; RX6.3 175,2705 TX6.3 ; RX7.3 175,3145 TX7.3 ; J5.1@155,150 155,195 400,440 ; TX8.3 175,3585 RX8.3 75,3705 60,3720 60,3787.17 155,3882.17 155,3895 210.68,3950.68 288.42,4028.42 891.03,4028.42 P2.5@945.56,3973.9 ; P3.1 968.15,359.33 C9.2 ; P2.6@1045.56,3973.9 1129.45,3890 1329.43,3890 1334.91,3895.47 1347.01,3895.47 1357.6,3906.06 R13.2 1360.1,3907.5 1360.1,3707.5 R15.2 ; v1(1115,2170) 1120.41,2170 1155.41,2135 1352.4,2135 C18.2 ; C3.1 1172.6,2297.9 1177.01,2302.31 1177.01,2319.41 C2.1 ; C10.1 D7.1 ; U3.5 1356.14,408.03 U3.6 ; U3.3 U3.6 ; 1815.16,1225 1860.47,1270.31 1860.47,1295.47 S1.1 ; S1.1@1892.5,1292.5 1921.49,1321.49 1921.49,1498.61 1950.47,1527.6 C1.1 ; C12.1 1887.6,372.6 1869.8,354.8 1869.8,329.21 1835.59,295 C11.1 1510.83,295 U3.6 ; 400,440 519,440 D8.2 540.7,418.3 644.3,418.3 R11.1 900.12,417.6 C9.2 ; C9.2 1023.9,422.48 D7.1 ; D7.1 1299.29,489.29 1299.29,422.56 1447.68,274.17 U3.6
  Top Layer w50: U3.6 1619.17,145 v1(1720,145) 1720,155 1760,195 v1(1775,195) 1805,165 v1(1850,165) 1900,165 v1(1930,195) ; v1(1755,1225) 1760.08,1230.08 1810.08,1230.08
  Bottom Layer w15: TX3.3 237.5,1327.5 362.5,1327.5 v1(365,1325) ; v1@585.32,1316.24 591.55,1310 728.34,1310 758.34,1340 v1(765.51,1340) ; v1(765,1460) 940.53,1460 965.53,1485 v1(975,1485) ; 2935,3205 2935,3033.79 2956.29,3012.5 v1(2960,3012.5) ; P4.3 3248.03,2680 3265,2696.97 ; v1(3265,3012.5) 3265,2696.97 ; J1.5 3265,2696.97
  Bottom Layer w20: v1(450,3815) 450,3765 1091.88,3123.12 ; 1085,2680 1105,2660 v1(1495,2660)
  Bottom Layer w25: P2.5@945.56,3973.9 P2.6@1045.56,3973.9
  Bottom Layer w30: J5.1@155,150 170,165 J5.1@233.74,165 ; J5.1@233.74,150 278.74,195 v1(1775,195) 1817.5,195 1830,182.5 ; v1@1720,165 1740,165 ; v1(1865,3015) 1865,3035 1970,3140 1970,3670 P1.20 P1.18 P1.16 P1.14 P1.12 P1.10 P1.8 P1.6 P1.4 2680,3760 3460,3760 3539.32,3839.32 J3.1@3595,3895
  Bottom Layer w50: v1@1075,2385 1075,2229.85 1105,2199.85 1105,2180 v1(1115,2170) ; v1(1085,2385) 1085,2680 1085,3116.25 ; v1(1720,145) 1740,165 ; v1(1755,1225) 1935,1405 1935,1763.14 2096.86,1925 v1(2115,1925) 2115,2201.57 v1(2367.97,2454.53) 2400,2486.57 2400,2750 ; v1(1775,195) v1@1775,1225 ; v1(1865,3015) 2135,3015 2400,2750 ; v1(1930,195) 1900,165 3570,165 3590,145 J4.1@3600.68,155.68 ; 2935,3205 2429.29,3205 2400,3175.71 2400,2750
GND_12v: Q1.3 Q2.3 | length 911.3
  Top Layer w15: Q1.3 2650,1735.16 2650,1425 2494.31,1269.31 2493.28,1269.31 2480.1,1256.13 2480.1,1213.87 2485,1208.97 2485,1200 2494.51,1190.49 2518.85,1190.49 2529.51,1179.83 2545.17,1179.83 2562.66,1162.34 2562.66,1107.57 2571.44,1098.79 2603.06,1098.79 2639.15,1062.7 2643.09,1062.7 2647.4,1058.39 Q2.3@2647.4,1054.45
GPIO0: P5.1 U1.25 | length 2833.1
  Top Layer w10: U1.25 2144.45,2103.85 2150.31,2097.99 2153.67,2097.99 2180.8,2070.87 2180.8,2003.7 2217.14,1967.35 v1(2217.14,1872.86)
  Bottom Layer w15: v1(2217.14,1872.86) 2300,1790 2300,1110 2780,630 3506.21,630 3515,621.21 3515,590 P5.1
GPIO1: P5.2 U1.26 | length 2806.7
  Top Layer w10: U1.26 2194.88,2221.42 2205,2211.3 2205,2000.71 v1(2275,1930.71)
  Bottom Layer w15: v1(2275,1930.71) 2281.7,1924.01 2281.7,1903.3 2290,1895 2325,1895 2330,1890 2335,1890 2335,1160 2345,1150 2345,1140 2820,665 3551.21,665 3560,656.21 3560,645 P5.2
GPIO2: P5.3 U1.27 | length 2729.1
  Top Layer w10: U1.27 2169.84,2241.1 2174.53,2236.42 2201.1,2236.42 2220,2217.51 2220,2115 2307.7,2027.3 2307.7,1997.3 v1(2303.31,1992.91)
  Bottom Layer w15: v1(2303.31,1992.91) 2340,1956.21 2353.12,1956.21 2370,1939.34 2370,1180 2850,700 3605,700 P5.3
GPIO3: P5.4 U1.28 | length 2662.7
  Top Layer w10: U1.28 2173.49,2260.79 2174.32,2259.95 2174.32,2257.83 2180.74,2251.42 2207.31,2251.42 2235,2223.73 2235,2150 v1@2347.7,2037.3
  Bottom Layer w15: v1(2350,2035) 2350.2,2034.8 2350.2,2025.33 2405,1970.53 2405,1200 2875,730 P5.4
IR_RX_1: RX1.2 U1.17 | length 3154.6
  Top Layer w10: v1(1713.16,2011.74) 1718.92,2017.5 1912.5,2017.5 1955.47,2060.47 U1.17
  Bottom Layer w20: RX1.2 165.78,420 175.31,410.47 207.41,410.47 212.41,405.47 257.59,405.47 289.53,437.41 289.53,448.82 535.32,694.61 535.32,1010.46 530,1015.78 530,1331.63 777.96,1579.59 1454.29,1579.59 1717.6,1842.9 1717.6,2007.29 v1(1713.16,2011.74)
IR_RX_2: RX2.2 U1.16 | length 2753.1
  Top Layer w10: v1(1672.6,1967.4) 1672.6,2027.75 1704.85,2060 1920,2060 1935.79,2075.79 U1.16
  Bottom Layer w20: RX2.2 182.58,860 207.58,835 304.15,835 462.86,993.7 462.86,1313.98 763.46,1614.59 1439.8,1614.59 1672.6,1847.4 v1(1672.6,1967.4)
IR_RX_3: RX3.2 U1.15 | length 2350.9
  Top Layer w10: v1(1614.5,1930.5) 1608.46,1936.54 1608.46,1944.82 1632.6,1968.96 1632.6,1983.96 1655.65,2007.01 1655.65,2032.01 1698.64,2075 1890.98,2075 1916.1,2100.12 U1.15
  Bottom Layer w20: RX3.2 192.89,1295 212.89,1275 385.71,1275 427.86,1317.14 427.86,1332.21 759.69,1664.04 1439.75,1664.04 1622.25,1846.54 1622.25,1887.96 1620.24,1889.97 1620.24,1924.76 v1(1614.5,1930.5)
IR_RX_4: RX4.2 U1.14 | length 2093.3
  Top Layer w10: v1(1572.25,1867.25) 1574.5,1869.5 1574.5,1947.07 1640.65,2013.22 1640.65,2038.22 1692.43,2090 1875,2090 1895.83,2110.83 1895.83,2119.15 1896.07,2119.4 1896.07,2150.2 U1.14
  Bottom Layer w20: RX4.2 202.89,1735 212.41,1725.47 1445.52,1725.47 1566.51,1846.46 1566.51,1861.51 v1(1572.25,1867.25)
IR_RX_5: RX5.2 U1.13 | length 2137
  Top Layer w10: v1(1484.67,1835.33) 1486.68,1837.35 1502.65,1837.35 1502.65,1863.48 1559.5,1920.32 1559.5,1953.28 1625.65,2019.43 1625.65,2044.43 1731.76,2150.55 U1.13
  Bottom Layer w20: RX5.2 76.24,2190 106.24,2160 175,2160 510,1825 988.11,1825 998.44,1835.33 v1(1484.67,1835.33)
IR_RX_6: RX6.2 U1.12 | length 2185.5
  Top Layer w10: v1(1485,1960) 1726.73,2201.73 U1.12
  Bottom Layer w20: RX6.2 110,2570 239.96,2570 914.96,1895 1443.64,1895 1479.26,1930.62 1479.26,1954.26 v1(1485,1960)
IR_RX_7: RX7.2 U1.11 | length 2361.7
  Top Layer w10: v1(1425,1940) 1432.65,1947.65 1432.65,1964.22 1473.43,2005 1501.21,2005 1717.63,2221.42 U1.11
  Bottom Layer w20: RX7.2 200,2920 247.34,2920 267.81,2899.53 274.88,2899.53 289.53,2884.88 289.53,2877.81 730.44,2436.9 730.44,2397.63 1188.08,1940 v1(1425,1940)
IR_RX_8: RX8.2 U1.10 | length 2900.9
  Top Layer w10: v1(1430,2020) 1495,2020 1716.1,2241.1 U1.10
  Bottom Layer w15: 593.41,2973.41 895.4,2671.42 895.4,2264.49 1197.4,1962.5 1382.6,1962.5 1407.5,1987.4 1407.5,1988.03 1430,2010.53 v1(1430,2020)
  Bottom Layer w20: RX8.2 155,3405 435,3405 580,3260 580,2986.82 593.41,2973.41
IR_TX_1: TX1.2 U4.15 | length 869.1
  Top Layer w15: TX1.2 441.98,766.98 441.98,1032.45 639.53,1230 U4.15
IR_TX_2: TX2.2 U4.14 | length 590.5
  Top Layer w15: v1(376.98,978.54) 382.03,983.59 382.03,1022.5 639.53,1280 U4.14
  Bottom Layer w20: TX2.2 352.39,995 368.86,978.54 v1(376.98,978.54)
IR_TX_3: TX3.2 U4.13 | length 477.4
  Top Layer w20: v1(365.51,1410) 551.22,1410 618.03,1343.19 625.36,1343.19 638.55,1330 U4.13
  Bottom Layer w20: TX3.2 337.39,1430 357.39,1410 v1(365.51,1410)
IR_TX_4: TX4.2 U4.12 | length 776.7
  Top Layer w20: v1(375.51,1870) 375.51,1641.96 624.28,1393.19 625.36,1393.19 638.55,1380 U4.12
  Bottom Layer w20: TX4.2 240,1875 370.51,1875 v1(375.51,1870)
IR_TX_5: TX5.2 U4.11 | length 1163.1
  Top Layer w20: v1(385,2305) 507.51,2182.49 507.51,1559.96 624.28,1443.19 625.36,1443.19 638.55,1430 U4.11
  Bottom Layer w20: TX5.2 v1@370,2305 ; v1(385,2305) v1@385,2320
IR_TX_6: TX6.2 U4.10 | length 1529.7
  Top Layer w20: v1(370,2720) 542.51,2547.49 542.51,1574.96 624.28,1493.19 625.36,1493.19 638.55,1480 U4.10
  Bottom Layer w20: TX6.2 336.88,2745 361.88,2720 v1(370,2720)
IR_TX_7: TX7.2 U4.9 | length 1905.2
  Top Layer w20: v1(360,3175) 665.51,2869.49 665.51,1531.67 669.35,1531.67 U4.9
  Bottom Layer w20: TX7.2 350,3185 v1(360,3175)
IR_TX_8: TX8.2 U4.7 | length 2478.8
  Top Layer w20: v1(365,3575) 770,3170 770,1522.05 786.45,1522.05 828.5,1480 U4.7
  Bottom Layer w20: TX8.2 285,3575 v1(365,3575)
IR_TX_A: U1.20 U4.1 | length 1665.5
  Top Layer w10: 1985,1970 1985,1979.64 1990.44,1985.08 1990.44,1990.04 2009.84,2009.45 2009.84,2069.49 2014.53,2074.17 U1.20
  Top Layer w20: U4.1 1067.76,1180 1770,1882.24 1932.24,1882.24 1970,1920 1970,1955 1985,1970
IR_TX_B: U1.19 U4.2 | length 1595.2
  Top Layer w10: 1935,1965 1965.44,1995.44 1965.44,2005.34 ; 1965,2010 1994.84,2039.84 U1.19
  Top Layer w20: U4.2 1064.5,1230 1751.74,1917.24 1904.16,1917.24 1935,1948.08 1935,1965
IR_TX_C: U1.18 U4.3 | length 1539
  Top Layer w10: 1896.54,1966.18 1905,1974.64 1905,1977.43 1921.38,1993.8 1924.16,1993.8 1935.18,2004.82 ; 1932.37,2007.63 1975.16,2050.41 U1.18
  Top Layer w20: U4.3 1065,1280 1737.24,1952.24 1884.82,1952.24 1896.54,1963.96 1896.54,1966.18
IR_TX_OE: U1.41 U4.6 | length 1684.8
  Top Layer w10: 1527.64,1927.36 1530,1929.71 1530,1945 1610,2025 1610,2050 1735,2175 1850,2175 2014.53,2339.53 U1.41
  Top Layer w15: U4.6 1012.16,1430 1464.99,1882.83 1483.12,1882.83 1527.64,1927.36
JNTRST: P1.3 R6.2 U1.40 | length 2138.8
  Top Layer w10: v1(2010,3095) 2085,3020 2085,2588.43 2034.21,2537.64 U1.40 ; v1(2595,3735) 2602.65,3727.35 2602.65,3710.81 2641.06,3672.4 R6.2 2645,3780.88 2650,3785.88 2650,3890 P1.3
  Bottom Layer w15: v1(2010,3095) 2112.28,3095 2132.8,3074.47 2306.65,3074.47 2352.5,3120.32 2352.5,3224.68 2595,3467.18 v1(2595,3735)
JTCK: P1.9 R7.2 U1.37 | length 1711.4
  Top Layer w10: U1.37 2093.27,2533.06 2230,2669.79 v1(2230,3140) ; R7.2 2288.94,3672.4 2350,3733.46 2350,3890 P1.9
  Top Layer w15: v1(2260,3725) 2262.97,3722.03 2262.97,3690.49 2281.06,3672.4 R7.2@2288.94,3672.4
  Bottom Layer w15: v1(2230,3140) 2230,3149.47 2260,3179.47 v1(2260,3725)
JTDI: P1.5 R12.2 U1.38 | length 2021.9
  Top Layer w10: U1.38 2073.58,2534.59 2150.41,2611.41 2150.41,3116.12 2151.59,3116.12 v1(2157.45,3121.97) ; v1(2470,3735) 2477.65,3727.35 2477.65,3715.81 2521.06,3672.4 R12.2 2525,3770.88 2550,3795.88 2550,3890 P1.5
  Bottom Layer w15: v1(2157.45,3121.97) 2157.45,3408.19 2150.41,3415.23 2150.41,3691.97 2238.43,3780 2425,3780 v1(2470,3735)
JTDO: P1.13 R17.2 U1.39 | length 1611.2
  Top Layer w10: U1.39 2053.9,2536.12 2100,2582.22 2100,3135 v1(2095,3140) ; P1.13 2111.48,3928.52 2111.48,3892.16 2145,3858.64 2145,3728.73 2090,3673.73 v1(2090,3670) 2162.6,3670 R17.2
  Bottom Layer w15: v1(2090,3670) 2092.5,3667.5 2092.5,3142.5 v1(2095,3140)
JTMS: P1.7 R8.2 U1.34 | length 1853.2
  Top Layer w10: U1.34 2085.86,2378.9 2080,2384.76 2080,2409.82 2300,2629.82 v1(2300,3135) ; v1(2389.81,3729.52) 2389.81,3687.6 R8.2 ; P1.7 2450,3890 2450,3805.88 2405,3760.88 v1@2405,3729.52
  Bottom Layer w15: v1(2300,3135) 2300,3639.72 v1(2389.81,3729.52)
Latch: P2.2 U1.45 | length 2238.9
  Top Layer w10: U1.45 1935.79,2522.94 1965,2552.15 v1(1965,2611.42)
  Bottom Layer w15: P2.2@645.56,3973.9 1334.45,3285 1634.6,3285 1787.5,3132.1 1787.5,2788.92 v1(1965,2611.42)
LED_TEST_1: D1.2 U1.2 | length 791.3
  Top Layer w10: 1587.25,2470 1626.01,2431.24 1626.01,2427.99 1655.07,2398.93 1825.2,2398.93 U1.2
  Top Layer w15: 1587.25,2470 1447.5,2609.75 1447.5,2679.68 1588.64,2820.81 1588.64,2874.64 D1.2
LED_TEST_2: D4.2 U1.3 | length 820
  Top Layer w10: D4.2 1420,2859 1420,2521.36 1491.36,2450 1549.64,2450 1554.64,2445 1557.78,2445 1623.88,2378.9 U1.3
  Top Layer w15: D4.2@1407.43,2848.43 D4.2
NC_RELAY1: K1.3 P14.3 | length 881.7
  Top Layer w30: 2873.43,2068.7 2964.72,2160 3396.3,2160 3486.3,2070 3680,2070
NC_RELAY2: K2.3 P6.3 | length 836.8
  Top Layer w30: 2879.21,1396.85 2976.06,1300 3356.3,1300 3491.3,1435 P6.3
NetC2_2: C2.2 U1.5 Y1.1 | length 613.1
  Top Layer w10: Y1.1 1585.47,2339.53 U1.5
  Top Layer w15: C2.2 1465,2330 Y1.1
NetC3_2: C3.2 U1.6 Y1.2 | length 644.4
  Top Layer w10: C3.2 1494.29,2230 1529.29,2195 Y1.2 1654.84,2319.84 U1.6
NetC4_1: C4.1 U2.1 | length 182.1
  Top Layer w15: C4.1 2651.17,3075 2656.17,3070 U2.1
NetC4_2: C4.2 U2.3 | length 192.5
  Top Layer w15: C4.2 2628.31,3000.2 2658.5,2970 U2.3
NetC5_1: C5.1 U2.2 | length 455.3
  Top Layer w20: U2.2 v1(2770,3020) ; v1(2822.22,3140) 2963.46,3140 3026.06,3077.4 C5.1
  Bottom Layer w20: v1(2770,3020) 2770,3087.78 v1(2822.22,3140)
NetC6_1: C6.1 U2.4 | length 186.1
  Top Layer w15: C6.1 2507.6,2920 U2.4
NetC6_2: C6.2 U2.5 | length 196.4
  Top Layer w15: C6.2 2631.1,2842.6 2658.5,2870 U2.5
NetC8_1: C8.1 U2.6 | length 509.8
  Top Layer w15: U2.6 2721.5,2820 2752.5,2789 2752.5,2740.81 2855.81,2637.5 2892.5,2637.5 2982.97,2727.97 2982.97,2734.91 2996.15,2748.09 3003.09,2748.09 3011.71,2756.71 3016.91,2756.71 C8.1
NetC13_1: C13.1 C18.1 L2.1 U1.9 | length 1177
  Top Layer w10: v1@1365,2009.31 1390,2034.31 1390,2036.57 1468.43,2115 1563.14,2115 1708.92,2260.79 U1.9
  Top Layer w15: v1(1045,2175) 1045,2217.6 L2.1 ; C13.1 C18.1 1365,2047.6 1365,2009.31 v1(1365,2005)
  Bottom Layer w15: v1(1045,2175) 1215,2005 v1(1365,2005)
NetD1_1: D1.1 R1.2 | length 111.6
  Top Layer w30: D1.1 1672.9,2876.9 1672.9,2983.1 R1.2
NetD2_1: D2.1 K1.4 Q1.2 | length 850
  Top Layer w15: D2.1 2550.59,1945 2577.12,1918.47 2577.12,1918 ; 2565,1930.12 2577.12,1918 ; Q1.2 2577.12,1865.13 Q1.2@2577.12,1866.93 ; K1.4 3025.73,1675 2838.49,1862.24 2581.81,1862.24 Q1.2@2577.12,1866.93 ; Q1.2@2577.12,1866.93 2577.12,1911.93 2577.12,1918
NetD3_1: D3.1 K2.4 Q2.2 | length 838.5
  Top Layer w15: D3.1 2565.59,1235 2569.9,1230.69 2569.9,1197.52 2592.66,1174.77 2592.66,1170.22 2605.69,1157.19 2605.69,1149.31 Q2.2 ; Q2.2@2610,1149.49 3134.45,1149.49 3215.79,1068.15 K2.4
NetD4_1: D4.1 R3.2 | length 126.5
  Top Layer w30: R3.2 1499.2,2983.2 1499.2,2861.8 D4.1
NetD7_2: D7.2 L1.1 U3.2 | length 3158.7
  Top Layer w15: 1580,735 1649.64,735 1655.25,729.39 1672.5,729.39 1675,726.89
  Top Layer w20: D7.2 1045,266.42 1045,55 1070,30 2100,30 2186.22,116.22 L1.1@2186.22,801.1 ; U3.2 1567.12,656.41 1567.12,722.12 1580,735 ; 1675,726.89 1683.11,726.89 1750,660 1897.56,660 1999.45,761.89 2147.01,761.89 L1.1@2186.22,801.1 ; L1.1 L1.1@2186.22,801.1
NetD8_1: D8.1 R10.1 | length 96.1
  Top Layer w30: R10.1 537.5,592.5 537.5,503.5 D8.1
NetJ1_2: J1.2 U2.14 | length 484.1
  Top Layer w15: U2.14 2908.14,2970 2914.78,2963.36 2914.78,2963.1 2927.88,2950 3015.46,2950 3026.4,2939.06 J1.2
NetJ1_3: J1.3 U2.13 | length 508.4
  Top Layer w15: U2.13 2910.47,2920 3000.47,2830 J1.3
NetP1_11: P1.11 R13.1 | length 846.3
  Top Layer w20: R13.1 1530,3910 1640,4020 2120,4020 P1.11
NetP1_17: P1.17 R14.1 | length 642.9
  Top Layer w20: R14.1 1432.4,3806.06 1447.99,3790.47 1451.93,3790.47 1467.4,3775 1633.28,3775 1645,3786.72 1645,3862.78 1777.22,3995 1845,3995 P1.17
NetP1_19: P1.19 R15.1 | length 528.7
  Top Layer w30: R15.1 1682.43,3705 1700,3722.57 1700,3840 P1.19
NetQ1_1: Q1.1 R5.2 | length 92.6
  Top Layer w15: R5.2@2450,1767.76 Q1.1
NetQ2_1: Q2.1 R16.2 | length 99.7
  Top Layer w15: R16.2 2520,1067.6 2537.09,1050.51 Q2.1
NetR9_1: R9.1 R11.2 U3.4 | length 1042.1
  Top Layer w30: R11.2 642.5,494.9 642.5,597.5 R9.1 1020,600 v1(1080,660) ; v1(1422.23,736.66) 1422.65,736.24 1422.65,646.64 U3.4
  Bottom Layer w30: v1(1080,660) 1160,740 1418.89,740 v1(1422.23,736.66)
NO_RELAY1: K1.2 P14.1 | length 822.3
  Top Layer w30: 2873.43,1675 2973.43,1575 3387.12,1575 3482.12,1670 P14.1
NO_RELAY2: K2.2 P6.1 | length 847.7
  Top Layer w30: 2879.21,1003.15 2992.36,890 3350,890 3495,1035 P6.1
NRST: C1.2 P1.15 R2.2 S1.2 U1.7 | length 4042.2
  Top Layer w10: v1(1311.31,2190) 1427.53,2190 1472.53,2145 1550.71,2145 1695,2289.29 1695,2290 1705.16,2300.16 U1.7 ; 1950,3795 1950,3890 P1.15
  Top Layer w25: v1(1645,3165) 1645,3490 1950,3795
  Top Layer w30: R2.2 1749.9,1612.5 S1.2@1872.5,1612.5 ; v1(1870,1662.93) 1872.5,1660.43 S1.2@1872.5,1612.5 ; S1.2@1882.6,1602.4 C1.2 ; S1.2@1872.5,1612.5 S1.2 S1.2@1872.5,1612.5
  Bottom Layer w10: v1(1311.31,2190) 1447.22,2190 ; v1(1645,3165) 1545,3065 1545,2660 1655,2550 1699.14,2550 1705,2544.14 1705,2360 1621.33,2276.33 1533.55,2276.33 1447.22,2190 ; 1730,2055 1593.57,2055 1458.57,2190 1447.22,2190
  Bottom Layer w15: 1730,2055 1875,1910 1875,1675 1870,1670 v1(1870,1662.93)
RELAY1_CONTROL: R5.1 U1.33 | length 1449.4
  Top Layer w10: U1.33 2199.51,2359.21 2205.3,2365 2230,2365 2260,2335 2440,2335 2535,2430 v1(2590,2430)
  Top Layer w15: R5.1@2461.01,1858.42 2453.94,1865.49 2414.51,1865.49 2378.71,1901.29 2378.71,1918.55 2760,2299.83 2760,2354.14 2752.93,2361.22 v1(2752.93,2425)
  Bottom Layer w15: v1(2590,2430) 2747.93,2430 v1(2752.93,2425)
RELAY2_CONTROL: R16.1 U1.32 | length 2058.3
  Top Layer w10: U1.32 2201.04,2339.53 2207.37,2345.86 2224.14,2345.86 2250,2320 2520,2320 2570,2370 2574.81,2365.19 v1(2585,2365.19)
  Top Layer w15: R16.1@2501.97,1160.43 2501.91,1160.49 2449.51,1160.49 2375,1235 2375,1755 2358.71,1771.29 2358.71,1938.71 2377.5,1957.5 2382.1,1957.5 2680,2255.4 2680,2380 2685,2380 2690,2385 v1(2692.5,2385)
  Bottom Layer w15: v1(2585,2365.19) 2585,2374.66 2594.47,2384.13 2594.47,2385 v1(2692.5,2385)
USART1_RX: U1.31 U2.12 | length 1283.3
  Top Layer w10: U1.31 2228.94,2319.84 2243.79,2305 2300,2305 2360,2245 v1(2360,2180)
  Top Layer w15: v1(2800.4,2867.38) 2801.71,2868.69 2877.66,2868.69 U2.12
  Bottom Layer w15: v1(2360,2180) 2360,2185 2396.7,2221.7 2396.7,2241.7 2507.5,2352.5 2507.5,2612.5 2762.38,2867.38 v1(2800.4,2867.38)
USART1_TX: U1.30 U2.11 | length 1320.1
  Top Layer w10: U1.30 2211.54,2300.16 2221.7,2290 2258.43,2290 2315,2233.43 2315,2142.95 v1(2313.54,2141.49) ; v1(2790.45,2808.21) 2798.73,2808.21 2805.97,2800.97 2825,2820 U2.11
  Bottom Layer w15: v1(2313.54,2141.49) 2320.03,2135 2410,2135 2537.5,2262.5 2537.5,2555.26 v1(2790.45,2808.21)
USART3_RX: U1.22 U2.9 | length 1868.9
  Top Layer w10: U1.22 2053.9,2081.12 2049.47,2076.69 2049.47,1780.38 2090,1739.85 v1(2090,1732.5)
  Top Layer w15: v1(2874.15,2686.33) 2874.15,2716.02 2878.14,2720 U2.9
  Bottom Layer w15: v1(2090,1732.5) 2099.47,1732.5 2121.97,1755 2124.5,1755 2174.64,1805.15 2174.64,1896.26 2251.22,1972.83 2251.22,2000.93 2327.79,2077.5 2515.03,2077.5 2875,2437.47 2875,2685.48 v1(2874.15,2686.33)
USART3_TX: U1.21 U2.10 | length 1974.7
  Top Layer w10: v1(2015,1758.28) 2015,1935.04 2024.84,1944.88 2024.84,2063.27 2034.21,2072.64 U1.21 ; v1(2808.1,2745.31) 2815.75,2752.96 2826.76,2752.96 2843.79,2770 U2.10
  Bottom Layer w15: v1(2015,1758.28) 2021.7,1764.98 2062.38,1764.98 2072.4,1775 2116.21,1775 2154.64,1813.43 2154.64,1904.54 2231.22,1981.12 2231.22,2009.21 2319.51,2097.5 2343.96,2097.5 2353.96,2107.5 2502.6,2107.5 2802.5,2407.4 2802.5,2442.6 2770,2475.1 2770,2707.21 v1(2808.1,2745.31)
pads on no net: J1.1 J1.4 J1.6 J1.7 J1.8 J1.9 J1.10 J1.11 U1.4 U1.29 U1.42

## Polygon pours and split planes (outlines as drawn)
no net on Top Overlay "NONET_L-01_P-001" (solid, remove dead copper): 3750,4055 5,4055 5,0 3750,0
GND on Bottom Layer "GND_L02_P000" (solid, remove dead copper, pour order 0): 3750,0 5,0 5,4055 3750,4055

## Keep-outs
Keep-Out Layer:
  lines w10: 0,4055 3750,4055 3750,0 5,0 5,4055

## Other copper
Top Layer:
  rectangle net GND: 1680,115 1975,235
Bottom Layer:
  rectangle net GND: 1610,105 2050,260

## Text inside footprints (layer, text, board x,y; h text height)
J1: Top Overlay "1" at 3250,3070 h40; Top Overlay "5" at 3214.06,2631.57 h40 r270; Top Overlay "9" at 3584.13,2686.1 h40 r270; Top Overlay "6" at 3584.13,3013.27 h40 r270
P6: Top Overlay "OUT" at 3742,1238 h25 r90
P14: Top Overlay "OUT" at 3737,1873 h25 r90